# Altium PCB Analog.PcbDoc
Units mil, origin at the board's own origin, x right, y up, seen from the top; angles counter-clockwise.
Board outline 2470 x 1465.3 mil, 2 copper layers (Top Layer, Bottom Layer); 15 components, 10 nets, 67 pads, 0 vias.
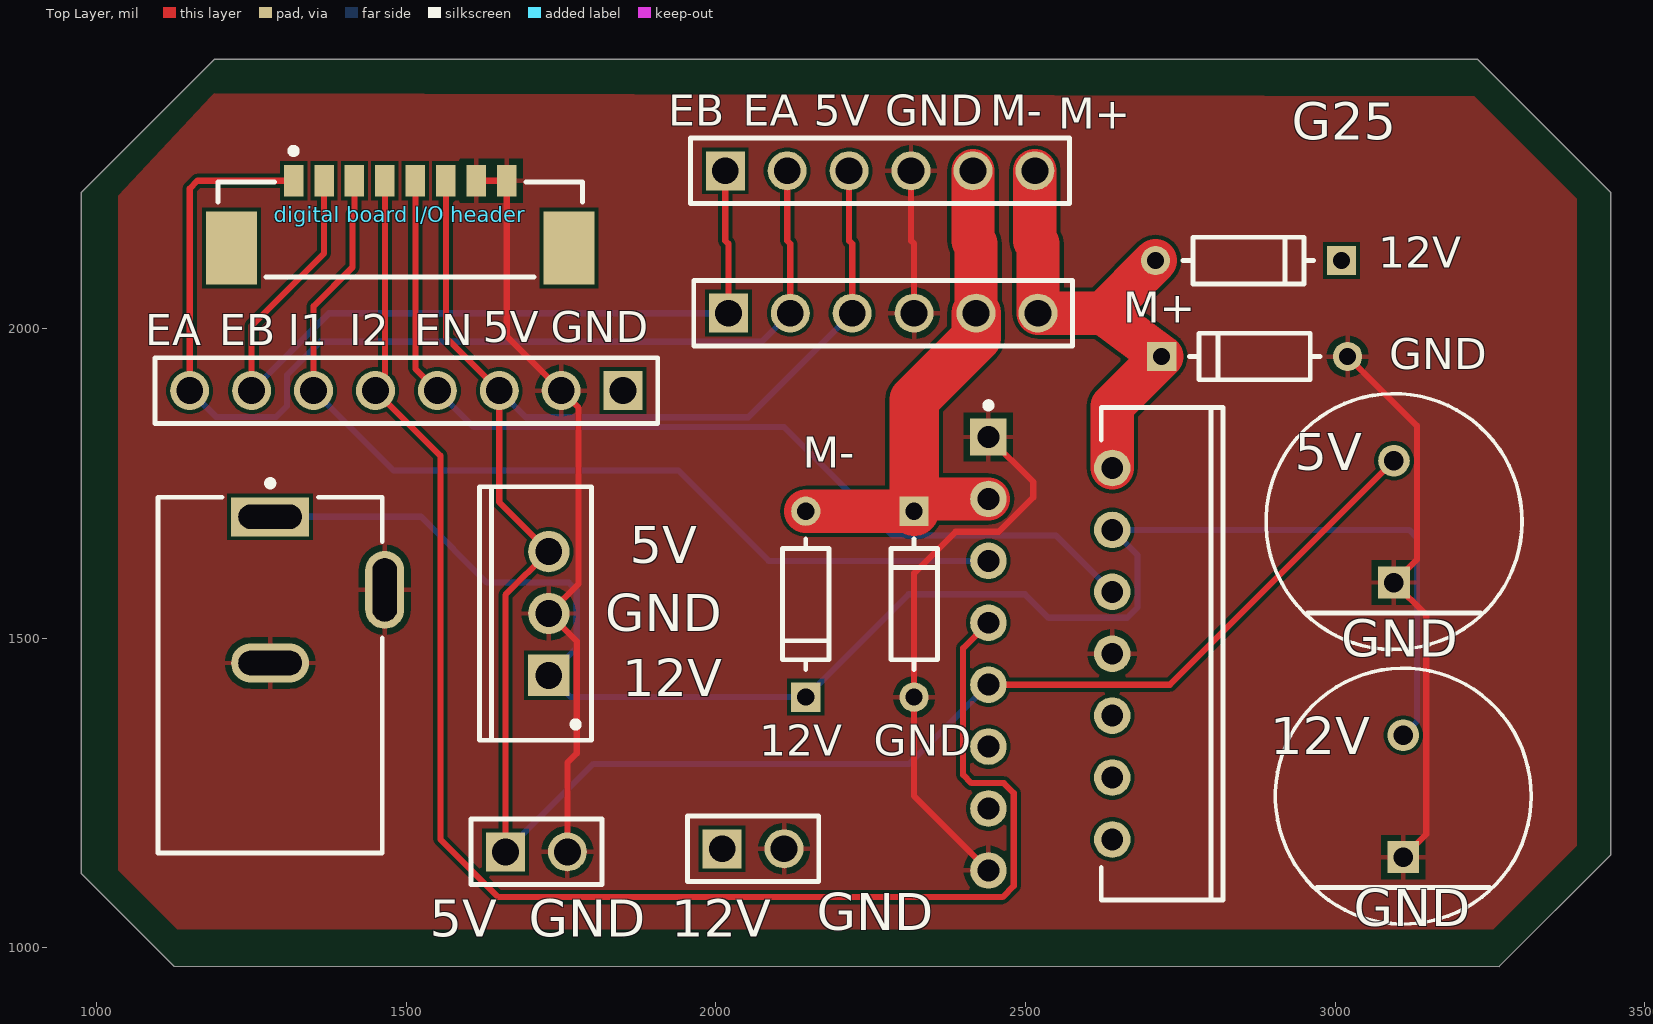
[diagram p0: Top Layer view]
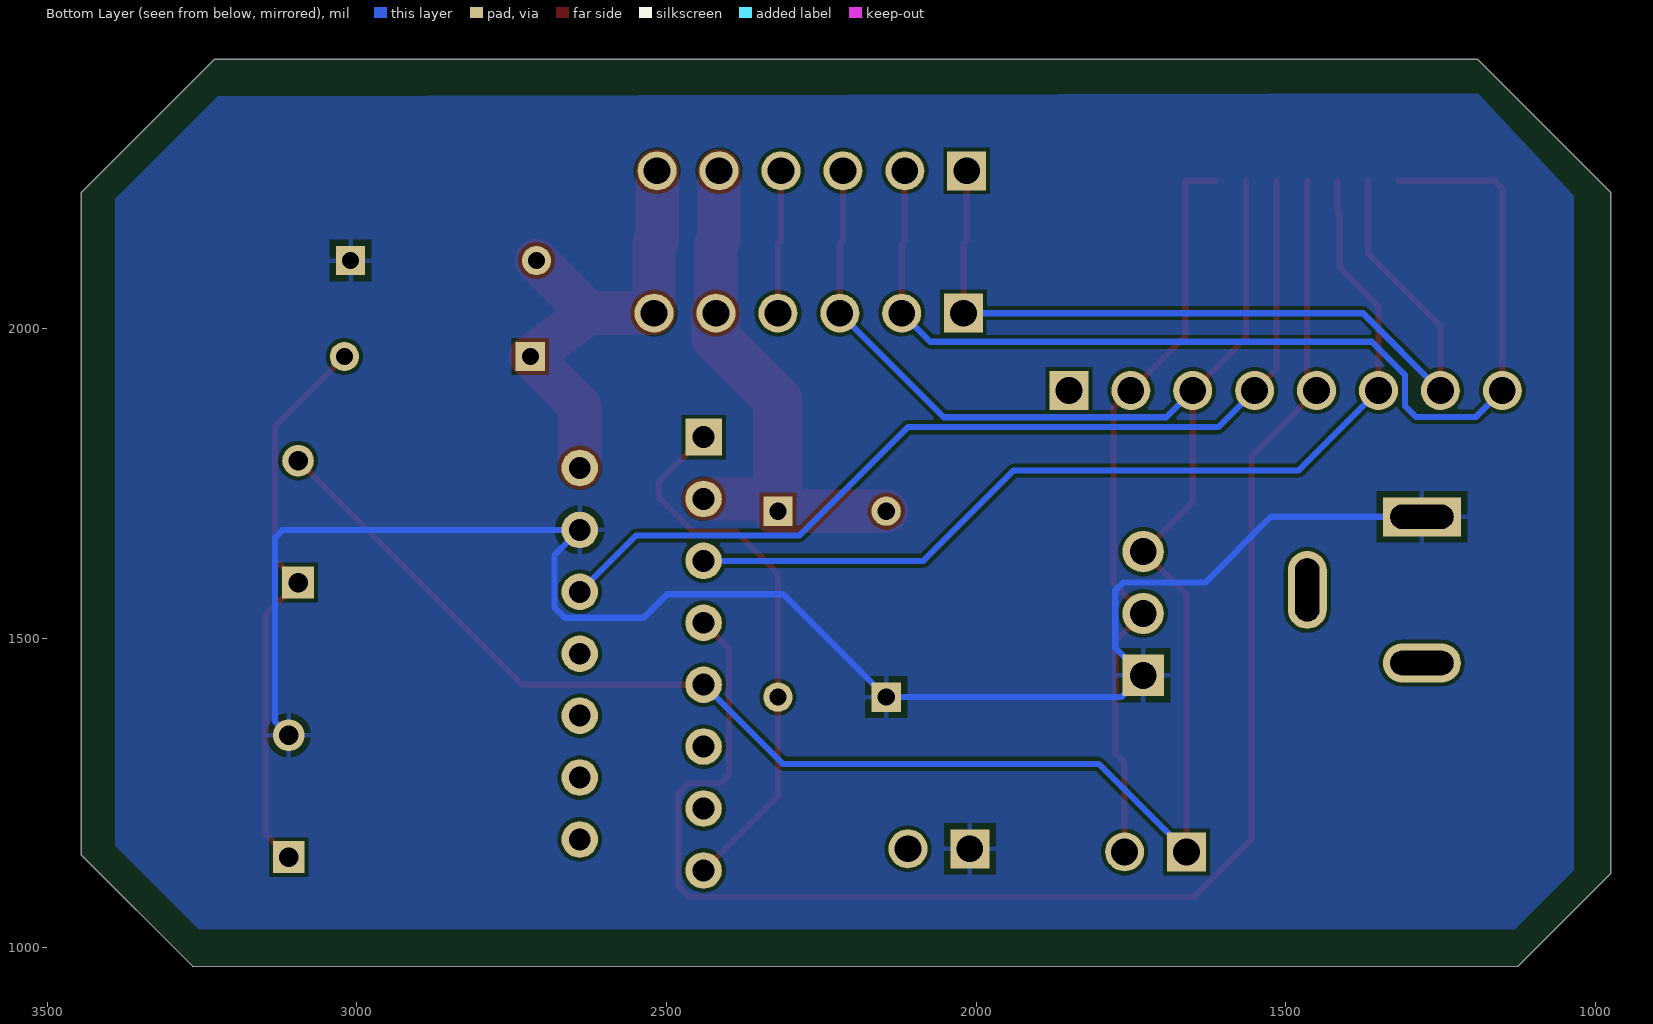
[diagram p1: Bottom Layer view, seen from below]
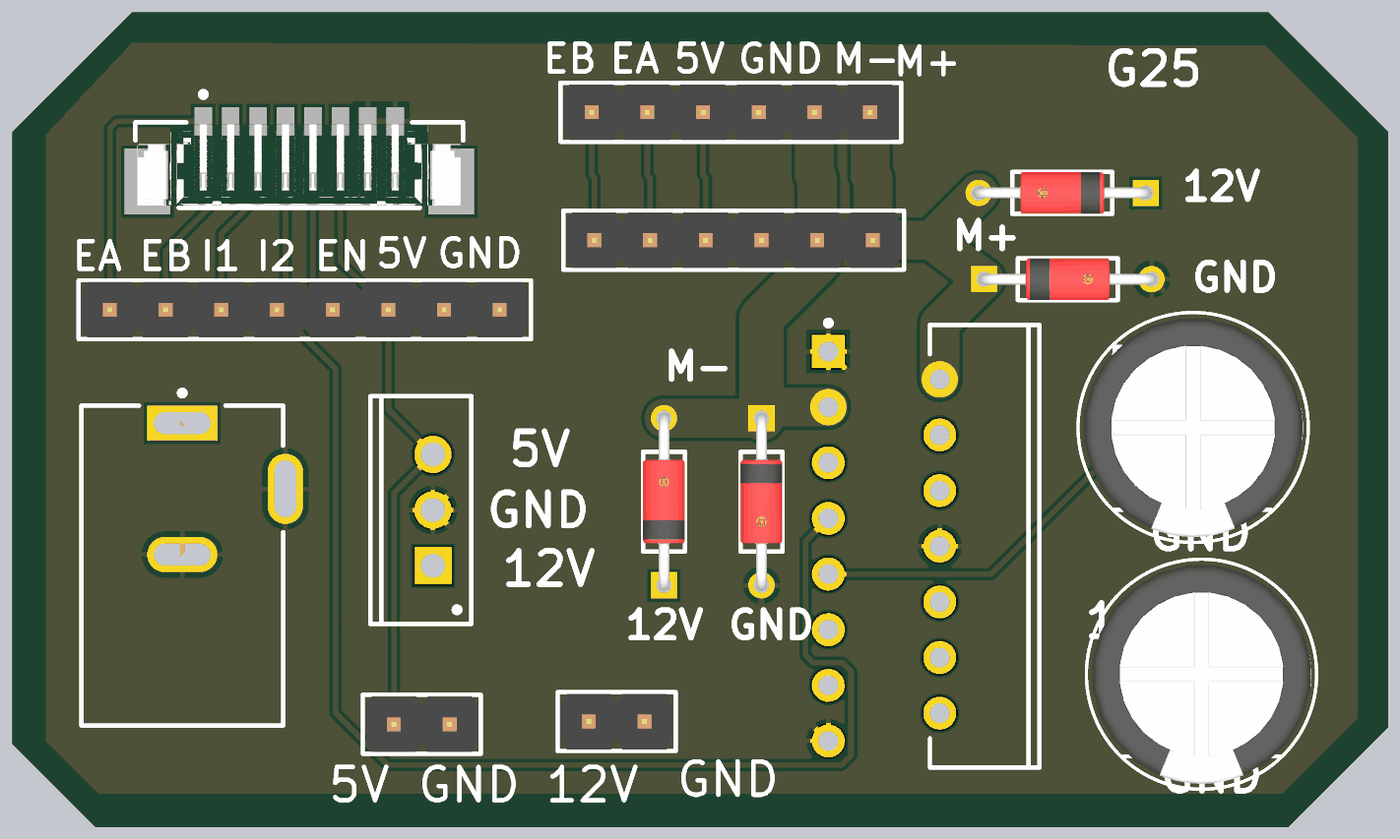
[diagram p2: 3D render of the assembled board from above, using the file's embedded part models]

## Layer stack, top to bottom
Top Solder: solder mask 0.4, Solder Resist, Dk 3.5
Top Layer: signal copper 1.4
Dielectric 1: dielectric 12.6, FR-4, Dk 4.8
Bottom Layer: signal copper 1.4
Bottom Solder: solder mask 0.4, Solder Resist, Dk 3.5

## Board outline
3264.7,969.7 3445,1150 3445,2220 3230,2435 1190,2435 975,2220 975,1120 1124.7,970.3

## Design rules (kind name [scope] priority, off if disabled: settings)
Clearance "Clearance~Sunstone Circuits" [All] p1: gap=6 ignorepadtopadclearanceinfootprint=FALSE except(0: Arc-Hole Track-Hole SMDPad-Hole THPad-Hole Via-Hole Fill-Hole Poly-Hole Region-Hole Text-Hole) // Sunstone Circuits Minimum Clearance Rule (Double Sided)
HoleSize "HoleSize~Sunstone Circuits" [All] p1: absolutevalues=TRUE maxlimit=251 minlimit=16 maxpercent=80.000 minpercent=20.000 // SSC Hole Size Rule For Single Sided & Double Sided Designs.
HoleSize Testpoint [All] p2: absolutevalues=TRUE maxlimit=100 minlimit=1 maxpercent=80.000 minpercent=20.000
HoleSize TestPointUsage [All] p3: absolutevalues=TRUE maxlimit=100 minlimit=1 maxpercent=80.000 minpercent=20.000
MinimumAnnularRing "MinimumAnnularRing~Sunstone Circuits" [All] p1: minimumring=7 // Sunstone Circuits Minimum Annular Ring (Double Sided)
PlaneClearance "PlaneClearance~Sunstone Circuits" [All] p1: clearance=12 // Sunstone Circuits Power Plane Clearance Rule (Double Sided)
PlaneConnect "PlaneConnect~Sunstone Circuits" [All] p1: planeconnectstyle=Relief reliefexpansion=10 reliefentries=4 reliefconductorwidth=8 reliefairgap=10 // Sunstone Circuits Power Plane Connect Rule (Double Sided)
PolygonConnect "PolygonConnect~Sunstone Circuits" [All] p1: connectstyle=Relief reliefconductorwidth=8 reliefentries=4 polygonreliefangle="90 Angle" airgapwidth=10 // Sunstone Circuits Polygon Connect Style (Double Sided)
RoutingVias "RoutingVias~Sunstone Circuits" [All] p1: holewidth=16 width=30 viastyle="Through Hole" minholewidth=16 minwidth=30 maxholewidth=20 maxwidth=40 // Sunstone Circuits Routing Vias Rule (Double Sided)
ShortCircuit "ShortCircuit~Sunstone Circuits" [All] p1: allowed=FALSE // Sunstone Circuits Short Circuit Rule~Do Not Allow (Double Sided)
SolderMaskExpansion "SolderMaskExpansion~Sunstone Circuits" [All] p1: expansion=3 istentingtop=FALSE // Sunstone Circuits Solder Mask Expansion Rule (Double Sided)
ViasUnderSMD "ViasUnderSMD~Sunstone Circuits" [All] p1: allowed=FALSE // Sunstone Circuits Vias Under SMD~Do Not Allow (Double Sided)
Width "Width~Sunstone Circuits" [All] p1: maxlimit=100 minlimit=6 preferedwidth=10 // Sunstone Circuits Minimum Width Rule (Double Sided)
26 further rules are at their usual default settings.

## Components (designator, comment, footprint, x,y, rotation, side; value= is the part's Value field where it differs from the comment)
5V-GND "61300211121" 61300211121 1710,1155 r0 top
12-GND "61300211121" 61300211121 2060,1160 r0 top
C1 "EEUFK1A182" FP-RAD-TH-D_10_0_5-L_20_2-MFG 3095,1688.42 r90 top
C2 "EEUFK1A182" FP-RAD-TH-D_10_0_5-L_20_2-MFG 3110,1245 r90 top
"digital board I/O header" "53398-0871" FP-53398-0871-MFG 1490,2160 r180 top
"Digital I/O test points" "61300811121" 61300811121 1500,1900 r180 top
driver "L298N" STM-FM-15 2540,1475 r0 top
jack "PJ-102A" FP-PJ-102A-MFG 1280,1440.32 r180 top
M+12FB "FJH1100" FP-017AG-MFG 2860,2110 r180 top value=2pF
M+GNDFB "FJH1100" FP-017AG-MFG 2870,1955 r0 top value=2pF
M-12VFB "FJH1100" FP-017AG-MFG 2145,1555 r90 top value=2pF
M-GNDFB "FJH1100" FP-017AG-MFG 2320,1555 r270 top value=2pF
"motor header test points" "61300611121" 61300611121 2265,2255 r0 top
motor_header "61300611121" 61300611121 2270,2025 r0 top
REGULATOR "L7805CV" TO220 1730,1540 r90 top

## Footprints (in the part's own frame and the unit in brackets; to place one, negate y for a bottom-side part, rotate by r counter-clockwise, add the part's x,y. Pads: shape width x height; smd on the part's side, far side on the other; paste and mask are expansions set on the pad)
61300211121 [mm] "Pin Header, pitch 2.54 mm, THT, Vertical, single row, 2p"
  rect 1.6x1.6 hole 1.1: 1(-1.27,0)
  round 1.6 hole 1.1: 2(1.27,0)
  silkscreen extent -2.69,-1.34 2.69,1.34, body extent -2.54,-1.27 2.54,1.27, height 8.57
61300611121 [mm] "Pin Header, pitch 2.54 mm, THT, Vertical, single row, 6p"
  rect 1.6x1.6 hole 1.1: 1(-6.35,0)
  round 1.6 hole 1.1: 2(-3.81,0) 3(-1.27,0) 4(1.27,0) 5(3.81,0) 6(6.35,0)
  silkscreen extent -7.77,-1.34 7.77,1.34, body extent -7.62,-1.27 7.62,1.27, height 8.57
61300811121 [mm] "Pin Header, pitch 2.54 mm, THT, Vertical, single row, 8p"
  rect 1.6x1.6 hole 1.1: 1(-8.89,0)
  round 1.6 hole 1.1: 2(-6.35,0) 3(-3.81,0) 4(-1.27,0) 5(1.27,0) 6(3.81,0) 7(6.35,0) 8(8.89,0)
  silkscreen extent -10.31,-1.34 10.31,1.34, body extent -10.16,-1.27 10.16,1.27, height 8.57
FP-017AG-MFG [mm]
  rect 1.2x1.2 hole 0.7 paste-1000 mask+0: 1(-3.813,0)
  round 1.2 hole 0.7 paste-1000 mask+0: 2(3.813,0)
  silkscreen extent -2.68,-0.95 2.68,0.95, body extent -4.51,-1.05 4.51,1.05, height 0.25
FP-53398-0871-MFG [mm]
  rect 0.8x1.3 smd paste+0 mask+0: 1(4.375,-2) 2(3.125,-2) 3(1.875,-2) 4(0.625,-2) 5(-0.625,-2) 6(-1.875,-2) 7(-3.125,-2) 8(-4.375,-2)
  rect 2.1x3 smd paste+0 mask+0: 9(-6.925,0.75) 10(6.925,0.75)
  silkscreen extent -7.48,-3.35 7.48,1.95, body extent -8.08,-2.75 8.08,2.35, height 0.25
FP-PJ-102A-MFG [mm]
  rect 3.2x1.6 hole 1 slot 2.6 at 0 deg paste-1000 mask+0: 1(0,-6.5)
  rrect100% 3.2x1.6 hole 1 slot 2.6 at 0 deg paste-1000 mask+0: 2(0,-0.5)
  rrect100% 1.6x3.2 hole 2.6 slot 1 at 0 deg paste-1000 mask+0: 3(-4.7,-3.5)
  silkscreen extent -4.6,-8 4.6,7.3
FP-RAD-TH-D_10_0_5-L_20_2-MFG [mm]
  rect 1.3x1.3 hole 0.8 paste-1000 mask+0: 1(-2.5,0)
  round 1.3 hole 0.8 paste-1000 mask+0: 2(2.5,0)
  silkscreen extent -5.25,-5.25 5.25,5.25, body extent -5.35,-5.35 5.35,5.35, height 0.25
STM-FM-15 [mm] "FM, 15-Leads, Body 20.2x5mm, Pitch 1.27mm"
  rect 1.5x1.5 hole 0.9: 1(-2.54,8.89)
  round 1.5 hole 0.9: 2(2.54,7.62) 3(-2.54,6.35) 4(2.54,5.08) 5(-2.54,3.81) 6(2.54,2.54) 7(-2.54,1.27) 8(2.54,0) 9(-2.54,-1.27) 10(2.54,-2.54) 11(-2.54,-3.81) 12(2.54,-5.08) 13(-2.54,-6.35) 14(2.54,-7.62) 15(-2.54,-8.89)
  silkscreen extent -2.66,-10.1 7.09,10.31, body extent -2.8,-10.1 7.09,10.1, height 21
TO220 [mm] "TO, Thru-Hole, Vertical, Heatsink Mounted; 3 In-Line Leads; Pitch 2.54 mm"
  rect 1.7x1.7 hole 1.1: 1(-2.54,0)
  round 1.7 hole 1.1: 2(0,0) 3(2.54,0)
  silkscreen extent -5.2,-1.75 5.2,2.85, body extent -5.25,-1.8 5.25,2.9, height 19.7

## Part data
5V-GND 12-GND: library part CMP-1712-00002-4, "THT Vertical Pin Header WR-PHD, Pitch 2.54 mm, Single Row, 2 pins", Contact Resistance=20mOhm, Manufacturer="Wurth Elektronik", Operating Temperature=-40to105degC, Rated Current=3A, Withstanding Voltage=500VAC, Working Voltage=250VAC, Datasheet URL=https://katalog.we-online.de/em/datasheet/6130xx11121.pdf, Gender=Male, Manufacturer URL=http://www.we-online.de, Mounting Technology=THT, Orientation=Vertical, Package Reference=61300211121, Packaging=Bag, Part Number=61300211121, Pin Number=2, Pitch=2.54mm, Publisher=WurthElektronik, Row Number=Single
C1 C2: library part CMP-05427-000951-1, "Aluminum Electrolytic Capacitors (Radial Lead Type) AEC-Q200 Qualified 1800uF ±20% 10V", Capacitance=1.8mF, Case/Package=Radial, Dielectric Material=Aluminium, Max Operating Temperature=105°C, Min Operating Temperature=-55°C, Package Quantity=200, Ripple Current=1.49A, Tolerance=20%, Voltage=10V, Construction=RADIAL, Diameter=10mm, Dissipation Factor=0.19%, Height=20mm, Lead Diameter=0.6mm, Lead Pitch=5mm, Lead/Base Style=Straight, Length=20mm, Life (Hours)=4000Hour, Mount="Through Hole", Packaging=Bulk, Radiation Hardening=No, REACH SVHC="No SVHC", RoHS Compliant=Yes, Series=FK, Termination=Radial, Voltage Rating=10V, Voltage Rating (DC)=10V
"digital board I/O header": library part CMP-04776-000009-1, "CONN HEADER SMD 8POS 1.25MM", Ambient Temperature Range High=+105°C, Ambient Temperature Range Low=-40°C, Current Rating=1A, Manufacturer=Molex, Package=0, Temperature="-40°C to +105°C", Voltage Rating=125V, Automotive=No, Category=Conn, ComponentLink2Description=Datasheet, ComponentLink2URL=https://www.molex.com/pdm_docs/ps/PS-51021-024-001.pdf, Conn Gender=Male, Conn Orientation=Vertical, Contact Material=Tin,Nickel, Device Class L1=Connectors, Device Class L2="Headers and Wire Housings", Device Class L3=unset, Digikey Description="CONN HEADER SMD 8POS 1.25MM", Footprint Url=https://www.molex.com/pdm_docs/sd/533980871_sd.pdf, Height=4.9mm, Lead Free=Yes, Manufacturer Part Number=53398-0871, Mouser Description="Headers & Wire Housings VERTICAL HDR SMT 8P", Number Of Contacts=8, Number Of Rows=1, Octopart=https://octopart.com/53398-0871-molex-655298, Pitch=1.25mm, RoHS=TRUE, Standoff Height=0.05mm, Temperature Range High=+105°C, Temperature Range Low=-40°C
"Digital I/O test points": library part CMP-1502-01076-1, "THT Vertical Pin Header WR-PHD, Pitch 2.54 mm, Single Row, 8 pins", Contact Resistance=20mOhm, Manufacturer="Wurth Elektronik", Operating Temperature=-40to105degC, Rated Current=3A, Withstanding Voltage=500VAC, Working Voltage=250VAC, Datasheet URL=https://katalog.we-online.de/em/datasheet/6130xx11121.pdf, Gender=Male, Manufacturer URL=http://www.we-online.de, Mounting Technology=THT, Orientation=Vertical, Package Reference=61300811121, Packaging=Bag, Part Number=61300811121, Pin Number=8, Pitch=2.54mm, Publisher=WurthElektronik, Row Number=Single
driver: library part CMP-2000-06526-1, "Dual Full-Bridge Driver, 4.8 to 46 V, -40 to 150 degC, 15-Pin FM (MW 15L), RoHS, Tube", Driver Case Style=Multiwatt, Manufacturer=STMicroelectronics, Operating Temperature Max=130°C, Operating Temperature Min=-25°C, Output Current=2A, Output Voltage=46V, Package Description="15-Pin Flange Mount, Body 5 x 19.6 mm, Pitch 1.27 mm", Package Reference=FM-15, PartNumber=L298, Supply Voltage Max=7V, Supply Voltage Min=4.5V, Automotive Qualification Standard=-, Datasheet URL=https://datasheet.ciiva.com/15109/getdatasheetpartid-50682-15109332.pdf, Datasheet Version=01/2000, Manufacturer URL=http://www.st.com/, Motor Type=FullBridge, Mounting Technology=ThroughHole, MSL=-, No. of Outputs=4Outputs, No. of Pins=15Pins, Packaging=Each, Product Range=-, SVHC=NoSVHC(17-Dec-2015)
jack: library part CMP-2000-06899-2, "CONN PWR JACK 2X5.5MM SOLDER", Current Rating=2.5A, Manufacturer=CUI, Temperature="-25°C to +85°C", Temperature Range High=+85°C, Temperature Range Low=-25°C, Voltage=24V, Automotive=No, Category=Conn, ComponentLink2Description=Datasheet, ComponentLink2URL=http://www.cui.com/product/resource/pj-102a.pdf, Conn Gender=Male, Conn Orientation="Right Angle", Contact Material=Tin,Nickel, Device Class L1=Connectors, Device Class L2="Power Connectors", Device Class L3=unset, Digikey Description="CONN PWR JACK 2X5.5MM SOLDER", Height=11.2mm, Industry Recognized Mating Diameter="2.10mm ID (0.083\"), 5.50mm OD (0.217\")", Lead Free=Yes, Manufacturer Part Number=PJ-102A, Mouser Description="DC Power Connectors Power Jacks", Number Of Contacts=3, Number of Positions/Contacts="2 Conductors, 3 Contacts", Octopart=https://octopart.com/pj-102a-cui-286936, Package=PJ-102A, RoHS=TRUE, Voltage Rating=24V
M+12FB M+GNDFB M-12VFB M-GNDFB: library part CMP-07163-000006-1, "DIODE GEN PURP 15V 150MA DO35", Capacitance=2pF, Forward Current=150mA, Manufacturer="ON Semiconductor", Max Junction Temp=+175°C, Package=017AG, Peak Reverse Current=0.00001uA, Reverse Voltage=30V, Temperature="to +175°C", Automotive=No, Category=Diode, ComponentLink2Description=Datasheet, ComponentLink2URL=https://www.onsemi.com/pub/Collateral/FJH1100-D.pdf, Device Class L1="Discrete Semiconductors", Device Class L2=Diodes, Device Class L3="Rectifier Diodes", Digikey Description="DIODE GEN PURP 15V 150MA DO35", Footprint Url=https://www.onsemi.com/pub/Collateral/017AG.PDF, Height=1.91mm, Lead Free=Yes, Manufacturer Part Number=FJH1100, Mouser Description="Rectifiers Small Signal Diode", Octopart=https://octopart.com/fjh1100-on+semiconductor-84327057, RoHS=TRUE, Temperature Range High=+175°C
"motor header test points" motor_header: library part CMP-1502-01070-1, "THT Vertical Pin Header WR-PHD, Pitch 2.54 mm, Single Row, 6 pins", Contact Resistance=20mOhm, Manufacturer="Wurth Elektronik", Operating Temperature=-40to105degC, Rated Current=3A, Withstanding Voltage=500VAC, Working Voltage=250VAC, Datasheet URL=https://katalog.we-online.de/em/datasheet/6130xx11121.pdf, Gender=Male, Manufacturer URL=http://www.we-online.de, Mounting Technology=THT, Orientation=Vertical, Package Reference=61300611121, Packaging=Bag, Part Number=61300611121, Pin Number=6, Pitch=2.54mm, Publisher=WurthElektronik, Row Number=Single
REGULATOR: library part CMP-0244-00483-1, "Positive Voltage Regulator, 5V, 3-Pin TO-220", ComponentLink1Description="Manufacturer URL", ComponentLink1URL=http://www.st.com, ComponentLink2Description=Datasheet, ComponentLink2URL=http://www.st.com/internet/com/TECHNICAL_RESOURCES/TECHNICAL_LITERATURE/DATASHEET/CD00000444.pdf, ComponentLink3Description="Package Specification", ComponentLink3URL=http://www.st.com/internet/com/TECHNICAL_RESOURCES/TECHNICAL_LITERATURE/PACKAGE_INFORMATION/CD00004649.pdf, DatasheetVersion=16/11/2011, PackageDescription="TO, Thru-Hole, Vertical, Heatsink Mounted; 3 In-Line Leads; Pitch 2.54 mm", PackageReference=TO220, PackageVersion=ver3.0

## Nets (pads, with @x,y where several pads share a name; then routed paths per layer and width w, separated by ;. In a path a pad name is that pad's centre, name@x,y a point inside that pad or via, vN(x,y) a via of type N, cw(c..) or ccw(c..) an arc to the next point about the centre after c; other vN are vias at no path point)
5V: 5V-GND.1 "digital board I/O header.6" "Digital I/O test points.3" "motor header test points.3" C1.2 driver.9 motor_header.3 REGULATOR.3 | length 3767.8
  Top Layer w10: 1563.82,2238.74 1563.82,1986.18 1650,1900 1650,1720 REGULATOR.3 1660,1570 5V-GND.1 ; 2215,2255 2215,2142 2220,2137 motor_header.3 ; driver.9 2733.15,1425 C1.2
  Bottom Layer w10: 1650,1900 1693,1857 2052,1857 motor_header.3 ; 5V-GND.1 1802,1297 2312,1297 driver.9
12V: 12-GND.1 C2.2 driver.4 jack.1 M+12FB.1 M-12VFB.1 REGULATOR.1 | length 2724.8
  Bottom Layer w10: jack.1 1523.78,1696.22 1630,1590 1762.5,1590 1775,1577.5 1775,1485 REGULATOR.1 1765.12,1404.88 M-12VFB.1 2311.12,1571 2499,1571 2537,1533 2664,1533 2681,1550 2681,1634 driver.4 3119.5,1675 3132,1662.5 3132,1365.43 C2.2
EN: "digital board I/O header.5" "Digital I/O test points.4" driver.6 | length 1578
  Top Layer w10: 1514.61,2238.74 1514.61,1935.39 1550,1900
  Bottom Layer w10: 1550,1900 1609,1841 2110,1841 2285,1666 2549,1666 driver.6
ENCA: "digital board I/O header.1" "Digital I/O test points.8" "motor header test points.2" motor_header.2 | length 1817.5
  Top Layer w10: 1150,1900 1150,2226.24 1162.5,2238.74 1317.76,2238.74 ; 2115,2255 2115,2142 2120,2137 motor_header.2
  Bottom Layer w10: 1150,1900 1192.5,1857.5 1289.5,1857.5 1307,1875 1307,1925 1361,1979 2074,1979 motor_header.2
ENCB: "digital board I/O header.2" "Digital I/O test points.7" "motor header test points.1" motor_header.1 | length 1441
  Top Layer w10: 1250,1900 1250,2004.73 1366.97,2121.7 1366.97,2238.74 ; 2015,2255 2015,2142 2020,2137 motor_header.1
  Bottom Layer w10: 1250,1900 1375,2025 motor_header.1
GROUND: 5V-GND.2 12-GND.2 "digital board I/O header.7" "digital board I/O header.8" "Digital I/O test points.2" "motor header test points.4" C1.1 C2.1 driver.1 driver.8 driver.15 jack.2 jack.3 M+GNDFB.2 M-GNDFB.2 motor_header.4 REGULATOR.2 | length 3265.1
  Top Layer w10: 1613.03,2238.74 1662.24,2238.74 1662.24,1987.76 1750,1900 1778,1872 1778,1588 REGULATOR.2 1775,1495 1775,1314 1760,1299 5V-GND.2 ; 2315,2255 2315,2142 2320,2137 motor_header.4 ; driver.15 2320,1245 M-GNDFB.2 2320,1605 2387,1672 2457,1672 2512.5,1727.5 2512.5,1752.5 driver.1 ; M+GNDFB.2 3132,1843.12 3132,1627 C1.1 3147,1538 3147,1183.57 C2.1
IN1: "digital board I/O header.3" "Digital I/O test points.6" driver.5 | length 1570.1
  Top Layer w10: 1350,1900 1350,2036.28 1412.97,2099.25 1412.97,2185.42 1416.18,2188.63 1416.18,2238.74
  Bottom Layer w10: 1350,1900 1479,1771 1939,1771 2085,1625 driver.5
IN2: "digital board I/O header.4" "Digital I/O test points.5" driver.7 | length 2592.3
  Top Layer w10: 1465.39,2238.74 1465.39,1915.39 1450,1900 1555,1795 1555,1175 1648,1082 2463,1082 2481,1100 2481,1250 2465,1266 2412.5,1266 2399,1279.5 2399,1484 driver.7
M+: "motor header test points.6" driver.2 M+12FB.2 M+GNDFB.1 motor_header.6 | length 912.3
  Top Layer w10: 2515,2142 2520,2137 ; 2624.88,2025 2650,2025 M+GNDFB.1
  Top Layer w70: 2515,2142 2515,2255 ; 2520,2137 motor_header.6 2624.88,2025 ; driver.2 2640,1875.12 M+GNDFB.1 2624.88,2025 ; M+12FB.2 2624.88,2025
M-: "motor header test points.5" driver.3 M-12VFB.2 M-GNDFB.1 motor_header.5 | length 896.6
  Top Layer w10: 2415,2142 2420,2137
  Top Layer w70: M-12VFB.2 M-GNDFB.1 2339.88,1725 driver.3 ; 2415,2142 2415,2255 ; motor_header.5 2420,2137
  Top Layer w80: M-GNDFB.1 2320,1885 2420,1985 motor_header.5
pads on no net: "digital board I/O header.9" "digital board I/O header.10" "Digital I/O test points.1" driver.10 driver.11 driver.12 driver.13 driver.14

## Polygon pours and split planes (outlines as drawn)
12V on Bottom Layer "12V_L02_P003" (solid, pour order 3): 3390,2210 3225,2375 1190,2380 1035,2215 1035,1125 1130,1030 3255,1030 3390,1165
GROUND on Top Layer "GROUND_L01_P002" (solid, pour order 2): 1130,1030 3255,1030 3390,1165 3390,2210 3225,2375 1190,2380 1185,2375 1035,2215 1035,1125 1075,1085

## Silkscreen, mask and mechanical layers (free items; w line width, h text height)
Top Overlay:
  text "EB" at 1923,2328 h50
  text "EA" at 2043,2328 h50
  text "5V" at 2158,2328 h50
  text "GND" at 2273,2328 h50
  text "M-" at 2443,2328 h50
  text "M+" at 2553,2323 h50
  text "G25" at 2930,2305 h60
  text "12V" at 3069.87,2098.27 h50
  text "M+" at 2657.55,2009.75 h50
  text "5V" at 1623,1978 h50
  text "GND" at 1733,1978 h50
  text "EA" at 1078,1973 h50
  text "EB" at 1198,1973 h50
  text "I1" at 1308,1973 h50
  text "I2" at 1408,1973 h50
  text "EN" at 1513,1973 h50
  text "GND" at 3087.55,1934.75 h50
  text "M-" at 2140,1775 h50
  text "5V" at 2934.91,1771.28 h60
  text "5V" at 1860.93,1621.19 h60
  text "GND" at 1821.19,1511.58 h60
  text "GND" at 3010,1470 h60
  text "12V" at 1848.64,1406.3 h60
  text "12V" at 2895.19,1313.03 h60
  text "12V" at 2070,1310 h50
  text "GND" at 2255,1310 h50
  text "GND" at 3030,1035 h60
  text "GND" at 2163,1028 h60
  text "5V" at 1538,1018 h60
  text "GND" at 1698,1018 h60
  text "12V" at 1928,1018 h60
Mechanical 1:
  lines w10: 980,1120 980,2220 1190,2430 3230,2430 3445,2215 3445,1160 3260,975 1125,975 980,1120